# EAGLE board design (EAGLE 9.5.1)

Size 30 x 30 mm. Coordinates in mm from the lower left corner, seen from the top.
Outline: 0,0 30,0 30,30 0,30 0,0
Copper layers (1*16): Top 0.035mm / dielectric 1.5mm / Bottom 0.035mm
Design rules "default": minimum track width 6mil, minimum drill 0.35mm, track to track 6mil, track to pad 6mil, pad to pad 6mil, via to via 6mil, smd to smd 6mil, copper to edge 40mil, drill to drill 6mil, minimum pad ring 10mil, minimum via ring 8mil, stop-mask expansion 4mil, vias tented up to drill 0mil, thermal gap 10mil

## Footprints (pad centres in the part's own frame; a part is rotated, then mirrored left to right if it is on the bottom)
0603 = smd 1.1 x 1: 1 -0.85,0; 2 0.85,0
WCAP-CSGP_0805_WAVE = smd 0.9 x 1.3: 1 -1.15,0; 2 1.15,0
0805 = smd 1.3 x 1.5: 1 -0.95,0; 2 0.95,0
WCAP-ASNP_8X10.5(DXL) = smd 4.2 x 1.9: 1 3.5,0; 2 -3.5,0
0402 = smd 0.7 x 0.9: 1 -0.65,0; 2 0.65,0
SOD-123 = smd 1.4 x 1.4: A 1.85,0; C -1.85,0
FOOT_XC6201P332PR-G = smd 0.9 x 1.3: 1 -1.5,-1.65; 3 1.5,-1.65 | smd 0.9 x 1.475: 2 0,-1.562 | smd 1.733 x 3.125: 2.1 0,0.738
SOP65P640X120-8N = smd 1.57 x 0.41: 1 -2.87,0.975; 2 -2.87,0.325; 3 -2.87,-0.325; 4 -2.87,-0.975; 5 2.87,-0.975; 6 2.87,-0.325; 7 2.87,0.325; 8 2.87,0.975
62201021121 = drill 0.7 pad 1.1: 1 -2.54,-0.635; 2 -2.54,0.635; 3 -1.27,-0.635; 4 -1.27,0.635; 5 0,-0.635; 6 0,0.635; 7 1.27,-0.635; 8 1.27,0.635; 9 2.54,-0.635; 10 2.54,0.635
WE-LQS_3015 = smd 1 x 2.7: 1 -1.2,0; 2 1.2,0
WE-DD_1260/1280 = smd 3.85 x 2.5: 1 -4.975,1.75; 2 -4.975,-1.75; 3 4.975,-1.75; 4 4.975,1.75
SJ_2S-TRACE = smd 0.635 x 1.27: 1 -0.508,0; 2 0.508,0
SOLDERJUMPER_REFLOW = smd 1.168 x 1.6: 1 -0.762,0; 2 0.762,0
TP20SQ = smd 2 x 2: TP 0,0
SOP50P490X110-10N = smd 1.422 x 0.279: 1 -2.184,0.991; 2 -2.184,0.508; 3 -2.184,0; 4 -2.184,-0.508; 5 -2.184,-0.991; 6 2.184,-0.991; 7 2.184,-0.508; 8 2.184,0; 9 2.184,0.508; 10 2.184,0.991
DPAK170P1435X465-6N = smd 3.21 x 1.05: 1 -6.13,3.4; 2 -6.13,1.7; 3 -6.13,0; 4 -6.13,-1.7; 5 -6.13,-3.4 | smd 8.46 x 10.53: 6 3.5,0

## Placement (x,y rotation side)
C3  10u  [0603]  -21.59,60.96 0 top  (outside the outline)
C4  10u  [0603]  -26.67,60.96 0 top  (outside the outline)
C19  10u  [0603]  -24.13,58.42 0 top  (outside the outline)
C20  10u  [0603]  -30.48,58.42 0 top  (outside the outline)
C23  1u  [WCAP-CSGP_0805_WAVE]  -30.48,49.53 0 top  (outside the outline)
C24  10u  [0805]  -52.07,49.53 0 top  (outside the outline)
C25  100 µF  [WCAP-ASNP_8X10.5(DXL)]  -52.07,7.62 0 top  (outside the outline)
C26  100 µF  [WCAP-ASNP_8X10.5(DXL)]  -19.05,24.13 0 top  (outside the outline)
C27  100n  [0603]  -36.83,58.42 0 top  (outside the outline)
C28  10u  [0603]  -43.18,58.42 0 top  (outside the outline)
C29  100n  [0402]  -33.02,60.96 0 top  (outside the outline)
C30  100n  [0402]  -39.37,60.96 0 top  (outside the outline)
C51  100n  [0402]  -45.72,60.96 0 top  (outside the outline)
C52  100n  [0402]  -52.07,60.96 0 top  (outside the outline)
C55  100n  [0402]  -58.42,60.96 0 top  (outside the outline)
C56  100n  [0402]  -17.78,63.5 0 top  (outside the outline)
C57  100n  [0603]  -49.53,58.42 0 top  (outside the outline)
D7  SS34  [SOD-123]  -36.83,44.45 0 top  (outside the outline)
IC2  AP7381-50Y-13  [FOOT_XC6201P332PR-G]  -59.69,22.86 0 top  (outside the outline)
IC4  AP7381-33Y-13  [FOOT_XC6201P332PR-G]  -22.86,36.83 0 top  (outside the outline)
IC7  TSC1031  [SOP65P640X120-8N]  -31.75,35.56 0 top  (outside the outline)
IC8  TSC1031  [SOP65P640X120-8N]  -41.91,35.56 0 top  (outside the outline)
IC10  TSC1031  [SOP65P640X120-8N]  -52.07,35.56 0 top  (outside the outline)
J2  62201021121  [62201021121]  -43.18,44.45 0 top  (outside the outline)
L2  2u2  [WE-LQS_3015]  -59.69,34.29 0 top  (outside the outline)
L3  [WE-DD_1260/1280]  -20.32,7.62 0 top  (outside the outline)
R7  4k7  [0603]  -54.61,58.42 0 top  (outside the outline)
R8  4k7  [0603]  -59.69,58.42 0 top  (outside the outline)
R9  100  [0603]  -16.51,60.96 0 top  (outside the outline)
R10  100  [0603]  -39.37,53.34 0 top  (outside the outline)
R11  100  [0603]  -45.72,53.34 0 top  (outside the outline)
R12  100  [0603]  -52.07,53.34 0 top  (outside the outline)
R13  39k  [0603]  -58.42,53.34 0 top  (outside the outline)
R16  0.01  [0805]  -59.69,49.53 0 top  (outside the outline)
R17  1k  [0603]  -17.78,55.88 0 top  (outside the outline)
R18  100  [0603]  -24.13,55.88 0 top  (outside the outline)
R19  100  [0603]  -30.48,55.88 0 top  (outside the outline)
R27  0.01  [0805]  -17.78,53.34 0 top  (outside the outline)
R28  1k  [0603]  -36.83,55.88 0 top  (outside the outline)
R29  0.01  [0805]  -25.4,53.34 0 top  (outside the outline)
R30  100  [0603]  -43.18,55.88 0 top  (outside the outline)
R31  100  [0603]  -49.53,55.88 0 top  (outside the outline)
R32  0.01  [0805]  -33.02,53.34 0 top  (outside the outline)
R33  1k  [0603]  -55.88,55.88 0 top  (outside the outline)
R34  100k  [0603]  -62.23,55.88 0 top  (outside the outline)
R35  10k  [0603]  -17.78,58.42 0 top  (outside the outline)
SJ1  SOLDERJUMPERTRACE  [SJ_2S-TRACE]  -59.69,44.45 0 top  (outside the outline)
SJ2  SOLDERJUMPERTRACE  [SJ_2S-TRACE]  -19.05,49.53 0 top  (outside the outline)
SJ3  SOLDERJUMPERTRACE  [SJ_2S-TRACE]  -26.67,49.53 0 top  (outside the outline)
SJ4  [SOLDERJUMPER_REFLOW]  -34.29,49.53 0 top  (outside the outline)
SJ5  [SOLDERJUMPER_REFLOW]  -39.37,49.53 0 top  (outside the outline)
SJ6  [SOLDERJUMPER_REFLOW]  -44.45,49.53 0 top  (outside the outline)
TP3  TPTP20SQ  [TP20SQ]  -16.51,44.45 0 top  (outside the outline)
TP4  TPTP20SQ  [TP20SQ]  -21.59,44.45 0 top  (outside the outline)
TP6  TPTP20SQ  [TP20SQ]  -26.67,44.45 0 top  (outside the outline)
TP7  TPTP20SQ  [TP20SQ]  -31.75,44.45 0 top  (outside the outline)
U1  ADS1115IDGST  [SOP50P490X110-10N]  -44.45,22.86 0 top  (outside the outline)
VR1  XL6009  [DPAK170P1435X465-6N]  -36.83,7.62 0 top  (outside the outline)

## Library data of the parts
C3 C4 C19 C20 C24 C27-C30 C51 C52 C55-C57 D7 R7-R13 R16-R19 R27-R35 SJ4-SJ6 = microbuilder
C23 = Kondensatoren (rev17a)
C25 C26 = Eagle_WCAP-ASNP (rev20a); DATASHEET-URL: https://www.we-online.com/catalog/datasheet/865250453009.pdf; DF: 17%; DIAMETER: 8mm; I-LEAK: 125uA; I-RIPPLE: 130mA; L: 10.5mm; OPERATING-TEMPERATURE: -40 °C up to +85 °C; PART-NUMBER: 865250453009; TECHNICAL-REFERENCE: ASBE105101M025DVCTEB000; VR: 25V(DC); Z: 0.308167Ohm
IC2 IC4 = AP7381; AVAILABILITY: Unavailable; DESCRIPTION: 250mA CMOS LDO, Isupply 1uA and 2% Vout Accuracy 3 SOT-89 T/R; MF: Microchip; MP: MCP1700T-3602E/MB; PACKAGE: SOT-89 Microchip; PRICE: None
IC7 IC8 IC10 = TSC1031
J2 = Eagle_WR-PHD (rev22a); DATASHEET-URL: https://www.we-online.com/redexpert/spec/62201021121?ae; GENDER: Pin Header; IR: 1A; MOUNT: THT; PACKAGING: Box; PART-NUMBER: 62201021121; PINS: 10; PITCH: 1.27mm; ROWS: Dual; TYPE: Straight
L2 = EMCComponents (rev19b); WE-NUMBER: 74404032022/2,2uH
L3 = PowerMagnetics (rev18e); WE-NUMBER: 744873150/15uH
SJ1-SJ3 = SparkFun-Retired
TP3 TP4 TP6 TP7 = testpad
U1 = ADS1115IDGST; AVAILABILITY: Unavailable; DESCRIPTION: 16-Bit ADC with Integrated MUX, PGA, Comparator, Oscillator, and Reference 10-VSSOP -40 to 125; MF: Texas Instruments; MP: ADS1115IDGST; PACKAGE: MSOP-10 Texas Instruments; PRICE: None
VR1 = XL6009; AVAILABILITY: Not in stock; DESCRIPTION: The XL6009 regulator is a wide input range, current mode, DC/DC converter which is capable of generating either positive or negative output voltages.; MF: XLSEMI; MP: XL6009; PACKAGE: TO-263-5L XLSEMI; PRICE: None

## Nets
3.3V: C52.1 C56.1 IC8.5 IC10.5
+3V3: C19.1 C27.1 C28.1 IC4.1 J2.5 R7.1 R8.1 U1.8
+5V: C3.1 C55.1 IC2.1 IC7.5 J2.6
AGND: C3.2 C4.2 C19.2 C20.2 C24.2 C25.2 C26.2 C27.2 C28.2 C52.2 C55.2 C56.2 C57.2 IC2.2 IC2.2.1 IC4.2 IC4.2.1 IC7.6 IC7.7 IC8.6 IC8.7 IC10.6 IC10.7 J2.3 J2.7 J2.8 L3.1 R17.2 R19.1 R28.2 R33.2 R35.1 SJ1.1 SJ2.1 SJ3.1 TP4.TP TP7.TP U1.1 U1.3 VR1.1
AIN0: C57.1 R34.1 R35.2 U1.4
AIN1: R18.1 R19.2 U1.5
AIN2: IC10.4 U1.6
AIN3: IC8.4 U1.7
I2C_SCL: U1.10
I2C_SDA: R7.2 R8.2 U1.9
N$3: C30.1 IC8.1 R12.1
N$5: C23.1 D7.A L3.4
N$9: C23.2 L3.3
N$10: C25.1 D7.C L2.1
N$11: C30.2 IC8.8 R9.1
N$12: IC8.3 SJ3.2
N$13: IC8.2 R17.1
N$25: IC7.3 SJ1.2
N$26: C29.1 IC7.1 R11.1
N$27: C29.2 IC7.8 R10.1
N$29: C51.1 IC10.1 R31.1
N$30: C51.2 IC10.8 R30.1
N$31: IC7.2 R28.1
N$32: IC10.3 SJ2.2
N$33: IC10.2 R33.1
SCL: J2.9
SDA: J2.10
UAV_BAT: C4.1 C20.1 IC2.3 IC4.3 R10.2 R27.1 R29.1 R30.2 R32.1 R34.2 SJ4.1 SJ5.1 TP3.TP
UAV_BAT_1: R11.2 R27.2 R29.2 SJ4.2 TP6.TP
V_SEPIC_IN: C26.1 L3.2 R31.2 R32.2 SJ5.2 VR1.3 VR1.4 VR1.6
V_SEPIC_OUT: C24.1 L2.2 R9.2 R16.1 SJ6.1
VAMP: J2.1 J2.2 J2.4 R12.2 R16.2 SJ6.2
VAMP_EN: VR1.2
VOUT_AIN1: IC7.4 R18.2

## Tracks (layer width: path | path; a pad name or v marks a point on that pad's centre or on a via)
3.3V  (3 unrouted)
+3V3  (7 unrouted)
+5V  (4 unrouted)
AGND  (39 unrouted)
AIN0  (3 unrouted)
AIN1  (2 unrouted)
AIN2  (1 unrouted)
AIN3  (1 unrouted)
I2C_SDA  (2 unrouted)
N$3  (2 unrouted)
N$5  (2 unrouted)
N$9  (1 unrouted)
N$10  (2 unrouted)
N$11  (2 unrouted)
N$12  (1 unrouted)
N$13  (1 unrouted)
N$25  (1 unrouted)
N$26  (2 unrouted)
N$27  (2 unrouted)
N$29  (2 unrouted)
N$30  (2 unrouted)
N$31  (1 unrouted)
N$32  (1 unrouted)
N$33  (1 unrouted)
UAV_BAT  (12 unrouted)
UAV_BAT_1  (4 unrouted)
V_SEPIC_IN  (7 unrouted)
V_SEPIC_OUT  (4 unrouted)
VAMP  (5 unrouted)
VOUT_AIN1  (1 unrouted)